# EAGLE board 6301_FP_second_try (EAGLE 7.7.0)
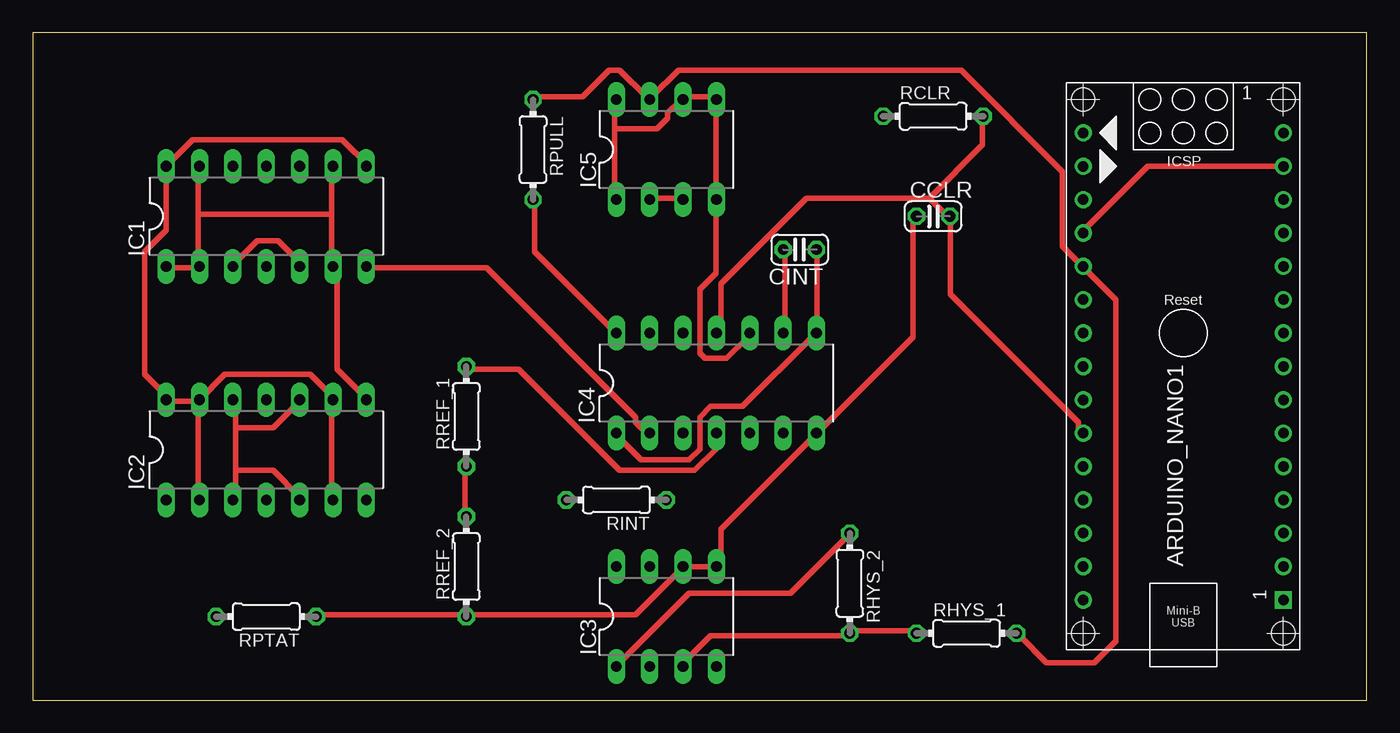
[diagram p0: board, top side]
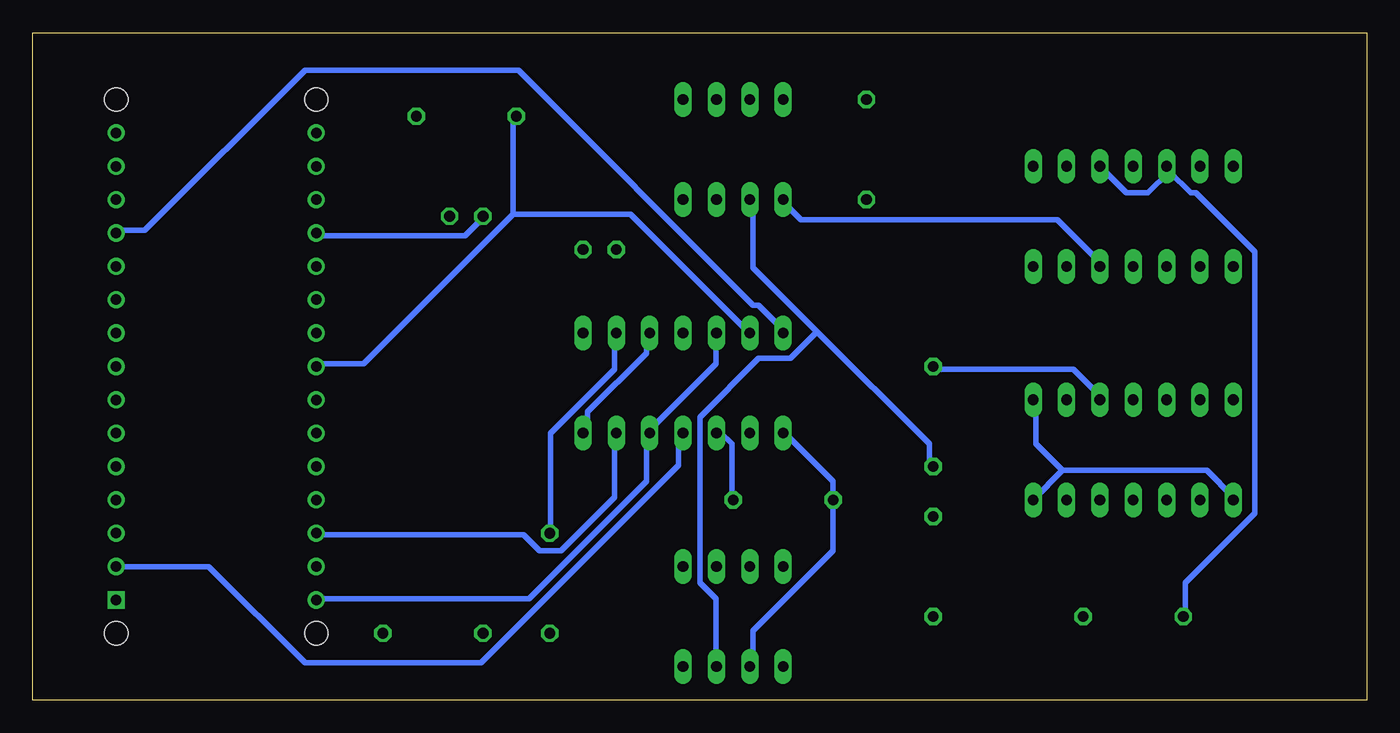
[diagram p1: board, bottom side, seen from below]

Size 101.6 x 50.8 mm. Coordinates in mm from the lower left corner, seen from the top.
Outline: 0,0 101.6,0 101.6,50.8 0,50.8 0,0
Copper layers (1*16): Top 0.035mm / dielectric 1.5mm / Bottom 0.035mm
Design rules "default *": minimum track width 10mil, minimum drill 24mil, track to track 16mil, track to pad 16mil, pad to pad 16mil, via to via 16mil, smd to smd 16mil, copper to edge 40mil, drill to drill 16mil, minimum pad ring 10mil, minimum via ring 8mil, stop-mask expansion 4mil, vias tented up to drill 0mil, thermal gap 10mil
Net classes: 0 default: width 0.406 mm, drill 0.406 mm, clearance 0.406 mm

## Footprints (pad centres in the part's own frame; a part is rotated, then mirrored left to right if it is on the bottom)
ARDUINO_NANO = drill 0.8 square: 1 -20.32,-7.62 | drill 0.8: 2 -17.78,-7.62; 3 -15.24,-7.62; 4 -12.7,-7.62; 5 -10.16,-7.62; 6 -7.62,-7.62; 7 -5.08,-7.62; 8 -2.54,-7.62; 9 0,-7.62; 10 2.54,-7.62; 11 5.08,-7.62; 12 7.62,-7.62; 13 10.16,-7.62; 14 12.7,-7.62; 15 15.24,-7.62; 16 15.24,7.62; 17 12.7,7.62; 18 10.16,7.62; 19 7.62,7.62; 20 5.08,7.62; 21 2.54,7.62; 22 0,7.62; 23 -2.54,7.62; 24 -5.08,7.62; 25 -7.62,7.62; 26 -10.16,7.62; 27 -12.7,7.62; 28 -15.24,7.62; 29 -17.78,7.62; 30 -20.32,7.62 | hole 1.778: -22.86,-7.62; -22.86,7.62; 17.78,7.62; 17.78,-7.62
C025-024X044 = drill 0.813 octagon: 1 -1.27,0; 2 1.27,0
DIL14 = drill 0.813 long: 1 -7.62,-3.81; 2 -5.08,-3.81; 3 -2.54,-3.81; 4 0,-3.81; 5 2.54,-3.81; 6 5.08,-3.81; 7 7.62,-3.81; 8 7.62,3.81; 9 5.08,3.81; 10 2.54,3.81; 11 0,3.81; 12 -2.54,3.81; 13 -5.08,3.81; 14 -7.62,3.81
DIL08 = drill 0.813 long: 1 -3.81,-3.81; 2 -1.27,-3.81; 3 1.27,-3.81; 4 3.81,-3.81; 5 3.81,3.81; 6 1.27,3.81; 7 -1.27,3.81; 8 -3.81,3.81
0204/7 = drill 0.813 octagon: 1 -3.81,0; 2 3.81,0

## Placement (x,y rotation side)
ARDUINO_NANO1  [ARDUINO_NANO]  87.63,27.94 90 top
CCLR  [C025-024X044]  68.58,36.83 0 top
CINT  [C025-024X044]  58.42,34.29 180 top
IC1  MPQ3904  [DIL14]  17.78,36.83 0 top
IC2  MPQ3906  [DIL14]  17.78,19.05 0 top
IC3  TL072P  [DIL08]  48.26,6.35 0 top
IC4  CD4066BE  [DIL14]  52.07,24.13 0 top
IC5  LM311N  [DIL08]  48.26,41.91 0 top
RCLR  [0204/7]  68.58,44.45 0 top
RHYS_1  [0204/7]  71.12,5.08 0 top
RHYS_2  [0204/7]  62.23,8.89 270 top
RINT  [0204/7]  44.45,15.24 180 top
RPTAT  [0204/7]  17.78,6.35 180 top
RPULL  [0204/7]  38.1,41.91 270 top
RREF_1  [0204/7]  33.02,21.59 90 top
RREF_2  [0204/7]  33.02,10.16 90 top

## Library data of the parts
ARDUINO_NANO1 IC1-IC5 = 6301-temp-sensor-rev1
CCLR CINT RCLR RHYS_1 RHYS_2 RINT RPTAT RPULL RREF_1 RREF_2 = rcl

## Nets
3V3: ARDUINO_NANO1.2 IC2.3 IC2.5 IC2.10 IC2.12 IC4.4 RREF_1.2
5V: ARDUINO_NANO1.12 IC4.14 RPULL.2
CLR: ARDUINO_NANO1.25 CCLR.2 IC4.11 RCLR.2
GND: ARDUINO_NANO1.14 ARDUINO_NANO1.19 CCLR.1 IC1.3 IC1.5 IC3.5 IC3.6 IC4.7 IC4.10 IC5.1 IC5.4 IC5.5 IC5.6 IC5.8 RPTAT.1 RREF_2.1
N$1: IC4.3 RINT.1
N$2: IC1.10 IC1.12 RPTAT.2
N$3: IC1.8 IC1.14 IC2.2 IC2.6 IC2.9 IC2.13 IC2.14
N$4: ARDUINO_NANO1.20 IC5.7 RHYS_1.2 RPULL.1
N$5: IC1.1 IC1.2 IC1.6 IC1.9 IC1.13 IC2.1 IC2.7 IC2.8
N$6: CINT.2 IC3.1 IC4.9 RHYS_2.1
N$9: IC1.7 IC4.2
N$10: CINT.1 IC3.2 IC4.1 IC4.8 RINT.2
SW_A: ARDUINO_NANO1.23 IC4.13 RCLR.1
SW_B: ARDUINO_NANO1.30 IC4.5 IC4.12
SW_C: ARDUINO_NANO1.28 IC4.6
V+: IC3.8
V-: IC3.4
VIN: ARDUINO_NANO1.15
VREF: IC3.3 IC5.2 IC5.3 RHYS_1.1 RHYS_2.2 RREF_1.1 RREF_2.2

## Tracks (layer width: path | path; a pad name or v marks a point on that pad's centre or on a via)
3V3
  Top 0.406: 15.44,20.73 15.44,22.76 IC2.12 | 15.44,20.73 15.44,17.48 | 15.44,17.48 15.44,15.44 IC2.3 | 15.44,17.48 18.29,17.48 20.32,15.44 IC2.5 | 15.44,20.73 18.29,20.73 20.32,22.76 IC2.10 | RREF_1.2 33.33,25.2 36.98,25.2 44.7,17.48 50.39,17.48 52.02,19.1 52.02,20.32 IC4.4
  Bottom 0.406: RREF_1.2 32.92,25.2 22.35,25.2 20.32,23.16 IC2.10 | ARDUINO_NANO1.2 88.19,10.16 80.87,2.85 67.46,2.85 52.43,17.88 52.43,20.32 IC4.4
5V
  Top 0.406: RPULL.2 38.2,37.8 38.2,34.14 44.3,28.04 IC4.14
  Bottom 0.406: ARDUINO_NANO1.12 95.1,35.76 93.07,35.76 80.87,47.95 64.62,47.95 46.74,30.07 46.33,30.07 44.3,28.04 IC4.14
CLR
  Top 0.406: ARDUINO_NANO1.25 79.65,20.32 79.65,21.13 69.9,30.89 69.9,36.58 CCLR.2 69.49,36.98 68.28,38.2 | 68.28,38.2 58.93,38.2 52.43,31.7 52.43,28.04 IC4.11 | 68.28,38.2 72.34,42.27 72.34,44.3 RCLR.2
GND
  Top 0.406: IC1.3 15.44,33.33 17.07,34.95 18.69,34.95 20.32,33.33 IC1.5 | 44.3,43.48 44.3,45.52 IC5.8 | 44.3,43.48 44.3,38.2 IC5.1 | 44.3,43.48 47.55,43.48 48.36,44.3 48.36,44.7 49.17,45.52 IC5.6 49.58,45.92 52.02,45.92 IC5.5 52.02,45.52 52.02,38.2 IC5.4 52.02,37.8 52.02,32.51 50.8,31.29 50.8,26.42 51.21,26.01 52.83,26.01 54.46,27.64 IC4.10 | ARDUINO_NANO1.14 84.94,40.64 80.06,35.76 ARDUINO_NANO1.19 | RPTAT.1 21.95,6.5 32.92,6.5 RREF_2.1 33.33,6.5 45.92,6.5 49.58,10.16 | 49.58,10.16 IC3.5 52.43,10.16 52.43,13.01 59.74,20.32 | 49.58,10.16 IC3.6 | 59.74,20.32 67.06,27.64 67.06,36.58 CCLR.1 | 59.74,20.32 IC4.7
  Bottom 0.406: IC1.5 20.32,33.33 23.57,36.58 43.08,36.58 44.3,37.8 IC5.1 | ARDUINO_NANO1.19 79.65,35.36 68.68,35.36 67.46,36.58 CCLR.1 | IC4.7 59.33,20.32 59.33,21.95 54.86,26.42 54.86,27.64 IC4.10
N$1
  Bottom 0.406: RINT.1 48.36,15.44 48.36,19.51 49.17,20.32 IC4.3
N$2
  Bottom 0.406: 15.04,40.23 15.44,40.64 IC1.12 15.04,40.23 | 15.04,40.23 13.41,38.61 13.01,38.61 8.53,34.14 8.53,14.22 13.82,8.94 13.82,6.5 RPTAT.2 | IC1.10 18.29,38.61 16.66,38.61 15.04,40.23
N$3
  Top 0.406: IC1.8 25.6,40.64 23.57,42.67 12.19,42.67 IC1.14 10.16,35.76 8.53,34.14 8.53,24.79 10.16,23.16 IC2.14 10.16,22.76 12.6,22.76 | IC2.6 22.76,15.44 22.76,22.76 IC2.9 22.76,23.16 21.13,24.79 14.63,24.79 IC2.13 12.6,22.76 | 12.6,22.76 12.6,15.44 IC2.2
N$4
  Top 0.406: RPULL.1 38.2,45.92 41.86,45.92 43.89,47.95 44.7,47.95 46.74,45.92 IC5.7 47.14,45.92 49.17,47.95 70.71,47.95 78.44,40.23 78.44,34.54 79.65,33.33 ARDUINO_NANO1.20 80.06,32.92 82.5,30.48 82.5,4.47 80.87,2.85 77.22,2.85 75.18,4.88 RHYS_1.2
N$5
  Top 0.406: 22.76,36.98 22.76,40.64 IC1.9 | 22.76,36.98 22.76,33.33 IC1.6 23.16,32.92 23.16,25.2 25.2,23.16 IC2.8 | IC1.1 10.16,32.92 12.6,32.92 IC1.2 12.6,33.33 12.6,36.98 | 12.6,36.98 12.6,40.64 IC1.13 | 12.6,36.98 22.76,36.98
  Bottom 0.406: 23.16,17.48 12.19,17.48 10.16,15.44 IC2.1 | IC2.7 23.16,17.48 | 23.16,17.48 25.2,19.51 25.2,22.76 IC2.8
N$6
  Top 0.406: IC4.9 57.3,28.04 57.3,34.14 CINT.2 | IC3.1 44.7,2.85 49.99,8.13 57.71,8.13 62.18,12.6 RHYS_2.1
  Bottom 0.406: IC4.9 57.3,27.64 57.3,25.2 62.18,20.32 62.18,13.01 RHYS_2.1
N$9
  Top 0.406: IC4.2 46.74,20.32 45.92,21.13 45.92,21.54 34.54,32.92 25.6,32.92 IC1.7
N$10
  Top 0.406: CINT.1 59.74,34.14 59.74,28.04 IC4.8 59.33,27.64 54.05,22.35 51.61,22.35 50.8,21.54 50.8,19.1 49.99,18.29 46.33,18.29 44.3,20.32 IC4.1
  Bottom 0.406: IC4.1 44.3,20.32 40.64,16.66 RINT.2 40.64,11.38 46.74,5.28 46.74,2.85 IC3.2
SW_A
  Bottom 0.406: 65.02,36.98 76.4,25.6 79.65,25.6 ARDUINO_NANO1.23 | 65.02,36.98 65.02,44.3 RCLR.1 | 65.02,36.98 56.08,36.98 47.14,28.04 IC4.13
SW_B
  Bottom 0.406: 54.86,20.32 54.86,16.66 63.8,7.72 79.65,7.72 ARDUINO_NANO1.30 | 54.86,20.32 49.58,25.6 49.58,27.64 IC4.12 | 54.86,20.32 IC4.5
SW_C
  Bottom 0.406: ARDUINO_NANO1.28 79.65,12.6 64.21,12.6 62.99,11.38 61.37,11.38 57.3,15.44 57.3,20.32 IC4.6
VREF
  Top 0.406: IC3.3 49.58,2.85 51.61,4.88 62.18,4.88 RHYS_2.2 62.59,5.28 67.06,5.28 RHYS_1.1 | IC5.2 47.14,38.2 49.17,38.2 IC5.3 | RREF_2.2 32.92,14.22 32.92,17.48 RREF_1.1
  Bottom 0.406: 41.86,28.04 33.33,19.51 33.33,17.88 RREF_1.1 | 41.86,28.04 46.74,32.92 46.74,37.8 IC5.2 | 41.86,28.04 43.89,26.01 46.33,26.01 50.8,21.54 50.8,8.94 49.58,7.72 49.58,2.85 IC3.3